# EAGLE board IOB-Adapter-Turtle_array (EAGLE 7.7.0)
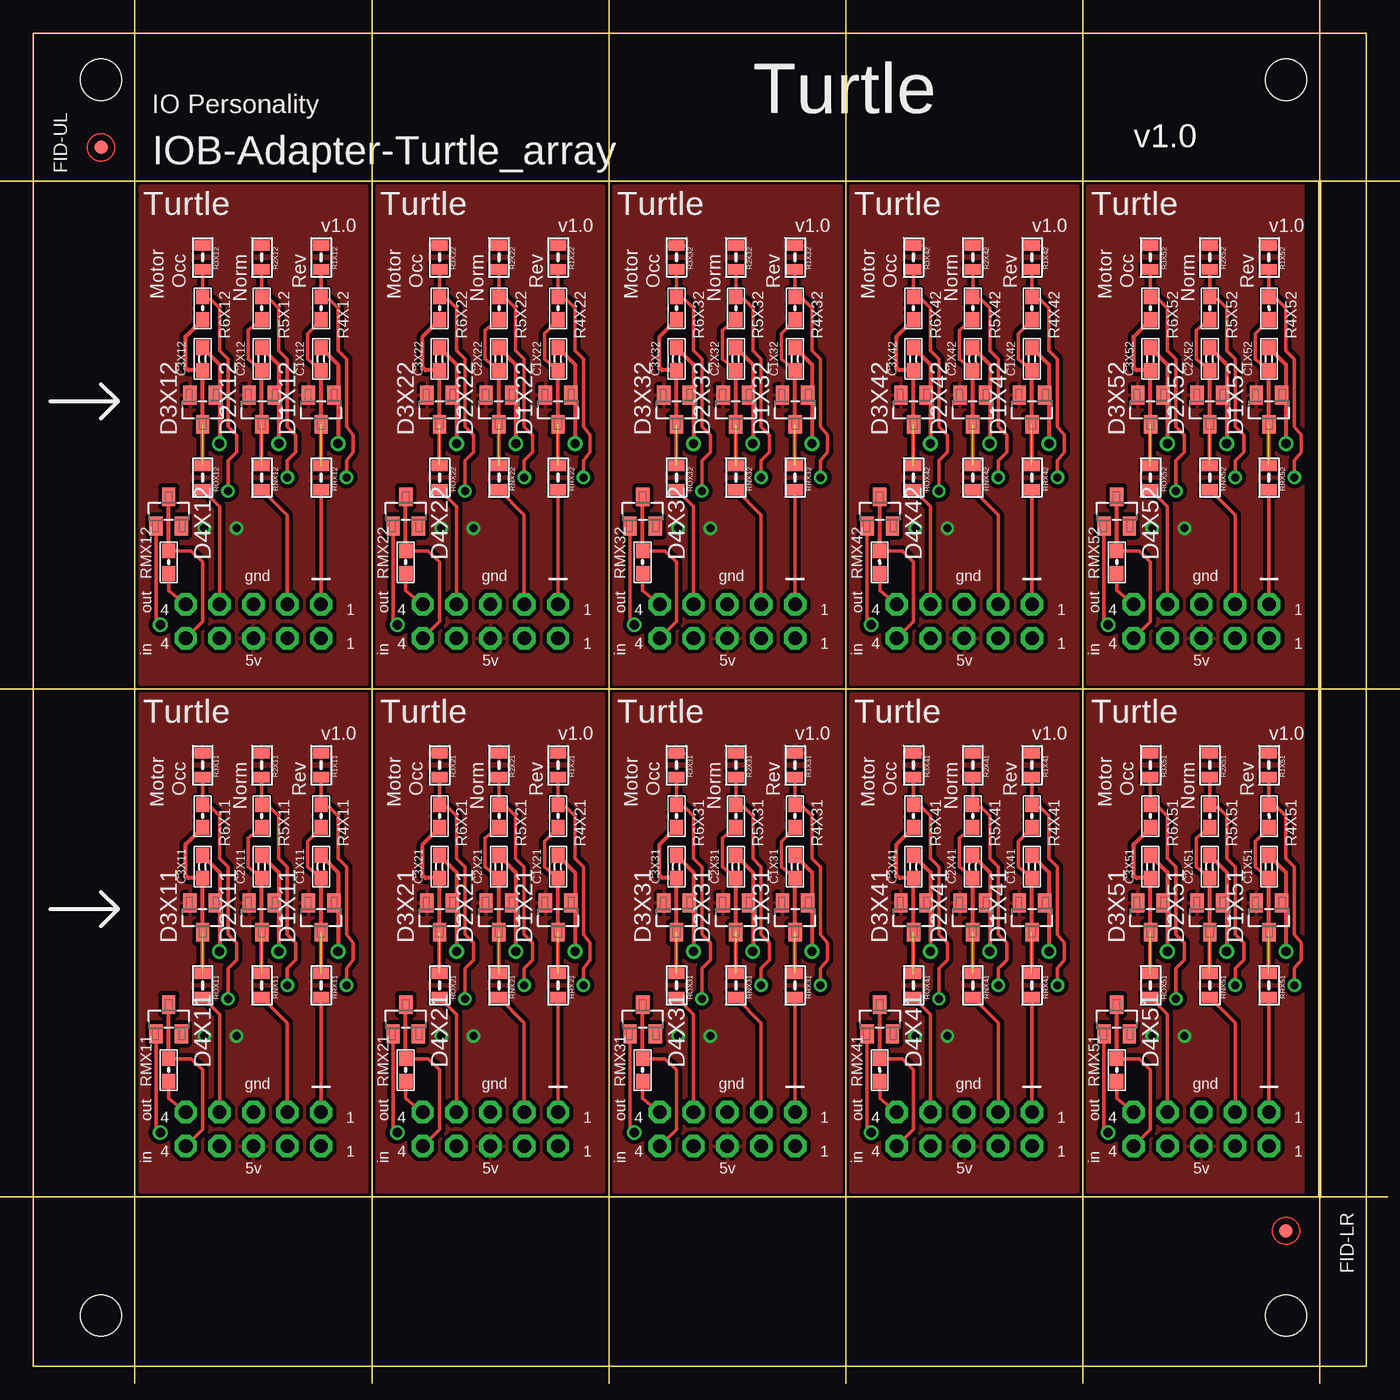
[diagram p0: board, top side]
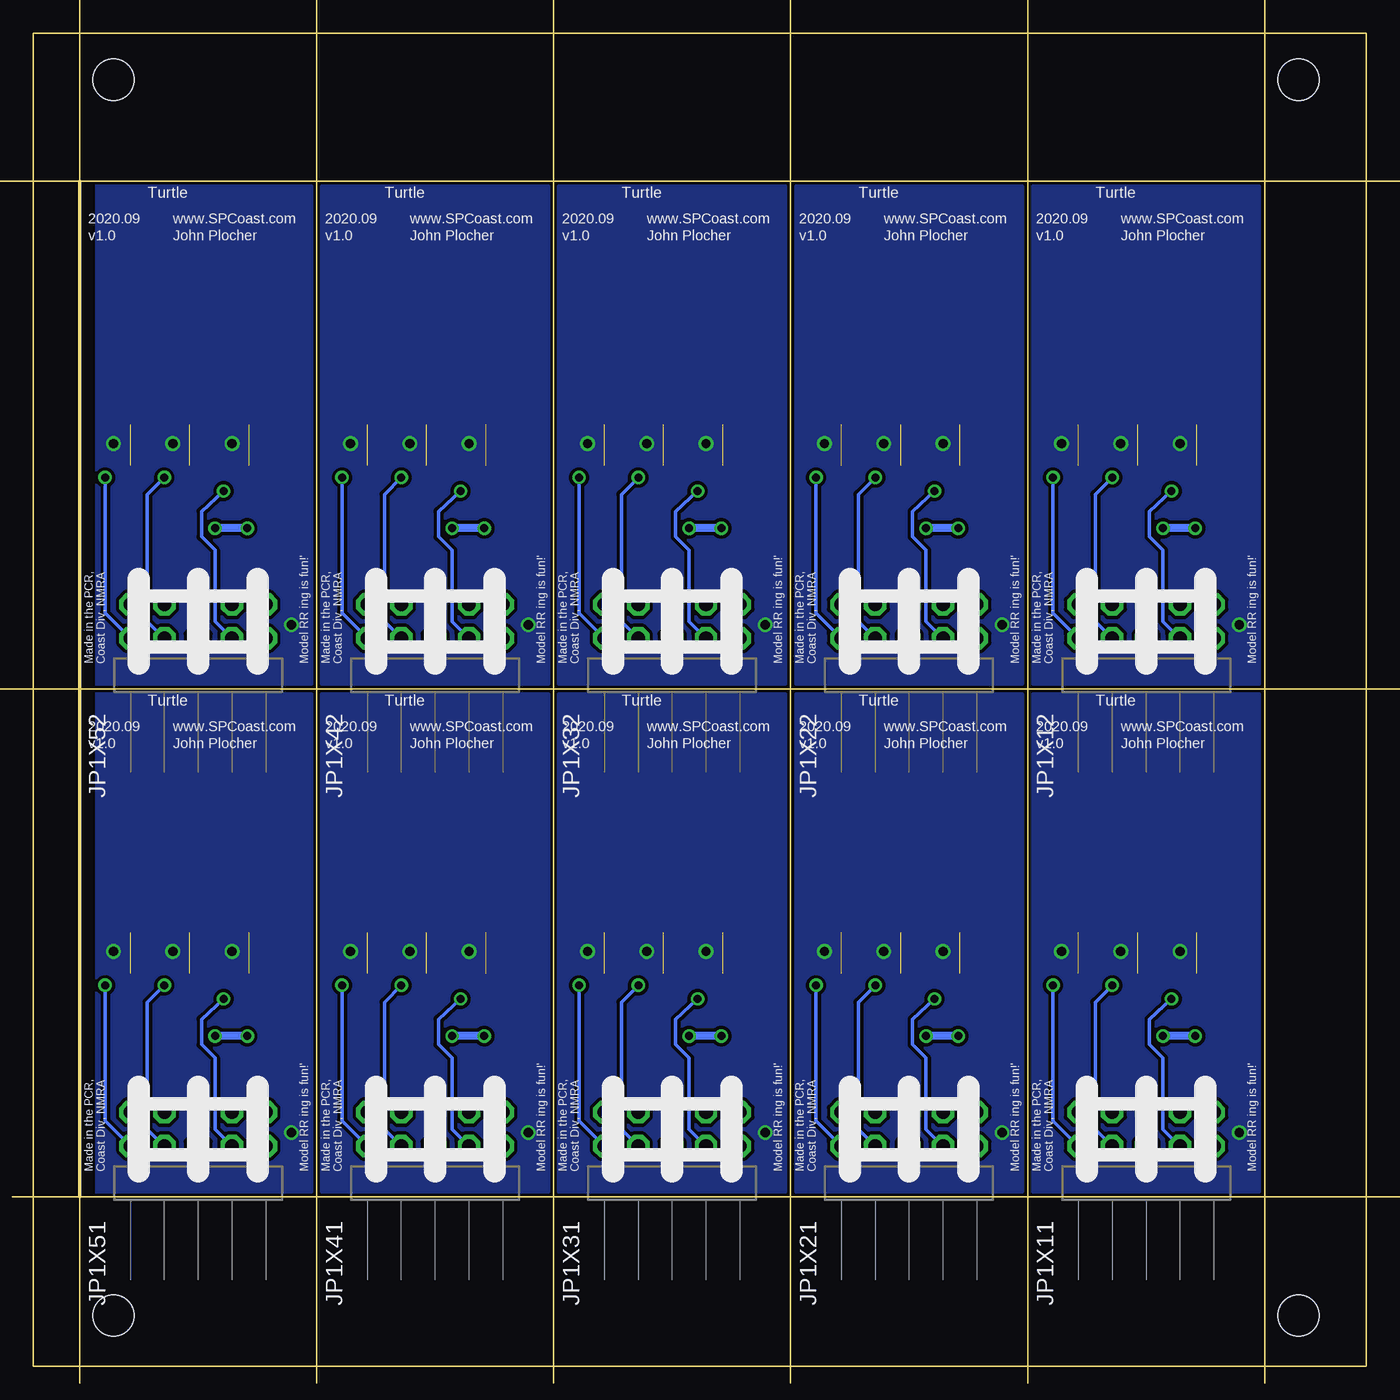
[diagram p1: board, bottom side, seen from below]

Size 100 x 100 mm. Coordinates in mm from the lower left corner, seen from the top.
Outline: 96.52,12.7 96.52,88.9
Copper layers (1*16): Top 0.035mm / dielectric 1.5mm / Bottom 0.035mm
Design rules "default": minimum track width 10mil, minimum drill 0.6mm, track to track 8mil, track to pad 8mil, pad to pad 8mil, via to via 8mil, smd to smd 8mil, copper to edge 40mil, drill to drill 8mil, minimum pad ring 10mil, minimum via ring 8mil, stop-mask expansion 4mil, vias tented up to drill 0mil, thermal gap 10mil

## Footprints (pad centres in the part's own frame; a part is rotated, then mirrored left to right if it is on the bottom)
0603-CAP = smd 1.1 x 1: 1 -0.85,0; 2 0.85,0
BOARD-DINRAIL-3.17IN-5X2-IOP = hole 3.1: 5.08,96.52; 93.98,96.52; 5.08,3.81; 93.98,3.81
SOT23 = smd 1.4 x 1: 1 1.1,-0.95; 2 1.1,0.95; 3 -1.1,0
FIDUCIAL_1MM = smd 1 x 1: 1 0,0
IOB-V3-MODULE = drill 1.016 pad 1.676 octagon: 1 -1.27,-5.08; 2 1.27,-5.08; 3 -1.27,-2.54; 4 1.27,-2.54; 5 -1.27,0; 6 1.27,0; 7 -1.27,2.54; 8 1.27,2.54; 9 -1.27,5.08; 10 1.27,5.08
0805-RES = smd 0.8 x 1.2: 1 -0.9,0; 2 0.9,0
0603-RES = smd 1.1 x 1: 1 -0.85,0; 2 0.85,0

## Placement (x,y rotation side)
C1X11  0.01uF  [0603-CAP]  21.59,37.47 90 top
C1X12  0.01uF  [0603-CAP]  21.59,75.56 90 top
C1X21  0.01uF  [0603-CAP]  39.37,37.47 90 top
C1X22  0.01uF  [0603-CAP]  39.37,75.56 90 top
C1X31  0.01uF  [0603-CAP]  57.15,37.47 90 top
C1X32  0.01uF  [0603-CAP]  57.15,75.56 90 top
C1X41  0.01uF  [0603-CAP]  74.93,37.47 90 top
C1X42  0.01uF  [0603-CAP]  74.93,75.56 90 top
C1X51  0.01uF  [0603-CAP]  92.71,37.47 90 top
C1X52  0.01uF  [0603-CAP]  92.71,75.56 90 top
C2X11  0.01uF  [0603-CAP]  17.14,37.47 90 top
C2X12  0.01uF  [0603-CAP]  17.14,75.56 90 top
C2X21  0.01uF  [0603-CAP]  34.92,37.47 90 top
C2X22  0.01uF  [0603-CAP]  34.92,75.56 90 top
C2X31  0.01uF  [0603-CAP]  52.7,37.47 90 top
C2X32  0.01uF  [0603-CAP]  52.7,75.56 90 top
C2X41  0.01uF  [0603-CAP]  70.48,37.47 90 top
C2X42  0.01uF  [0603-CAP]  70.48,75.56 90 top
C2X51  0.01uF  [0603-CAP]  88.27,37.47 90 top
C2X52  0.01uF  [0603-CAP]  88.27,75.56 90 top
C3X11  0.01uF  [0603-CAP]  12.7,37.47 90 top
C3X12  0.01uF  [0603-CAP]  12.7,75.56 90 top
C3X21  0.01uF  [0603-CAP]  30.48,37.47 90 top
C3X22  0.01uF  [0603-CAP]  30.48,75.56 90 top
C3X31  0.01uF  [0603-CAP]  48.26,37.47 90 top
C3X32  0.01uF  [0603-CAP]  48.26,75.56 90 top
C3X41  0.01uF  [0603-CAP]  66.04,37.47 90 top
C3X42  0.01uF  [0603-CAP]  66.04,75.56 90 top
C3X51  0.01uF  [0603-CAP]  83.82,37.47 90 top
C3X52  0.01uF  [0603-CAP]  83.82,75.56 90 top
CARRIER  BOARD  [BOARD-DINRAIL-3.17IN-5X2-IOP]  0,0 0 top
D1X11  BAT54S  [SOT23]  21.59,33.66 90 top
D1X12  BAT54S  [SOT23]  21.59,71.75 90 top
D1X21  BAT54S  [SOT23]  39.37,33.66 90 top
D1X22  BAT54S  [SOT23]  39.37,71.75 90 top
D1X31  BAT54S  [SOT23]  57.15,33.66 90 top
D1X32  BAT54S  [SOT23]  57.15,71.75 90 top
D1X41  BAT54S  [SOT23]  74.93,33.66 90 top
D1X42  BAT54S  [SOT23]  74.93,71.75 90 top
D1X51  BAT54S  [SOT23]  92.71,33.66 90 top
D1X52  BAT54S  [SOT23]  92.71,71.75 90 top
D2X11  BAT54S  [SOT23]  17.14,33.66 90 top
D2X12  BAT54S  [SOT23]  17.14,71.75 90 top
D2X21  BAT54S  [SOT23]  34.92,33.66 90 top
D2X22  BAT54S  [SOT23]  34.92,71.75 90 top
D2X31  BAT54S  [SOT23]  52.7,33.66 90 top
D2X32  BAT54S  [SOT23]  52.7,71.75 90 top
D2X41  BAT54S  [SOT23]  70.48,33.66 90 top
D2X42  BAT54S  [SOT23]  70.48,71.75 90 top
D2X51  BAT54S  [SOT23]  88.27,33.66 90 top
D2X52  BAT54S  [SOT23]  88.27,71.75 90 top
D3X11  BAT54S  [SOT23]  12.7,33.66 90 top
D3X12  BAT54S  [SOT23]  12.7,71.75 90 top
D3X21  BAT54S  [SOT23]  30.48,33.66 90 top
D3X22  BAT54S  [SOT23]  30.48,71.75 90 top
D3X31  BAT54S  [SOT23]  48.26,33.66 90 top
D3X32  BAT54S  [SOT23]  48.26,71.75 90 top
D3X41  BAT54S  [SOT23]  66.04,33.66 90 top
D3X42  BAT54S  [SOT23]  66.04,71.75 90 top
D3X51  BAT54S  [SOT23]  83.82,33.66 90 top
D3X52  BAT54S  [SOT23]  83.82,71.75 90 top
D4X11  4.7v  [SOT23]  10.16,26.04 270 top
D4X12  4.7v  [SOT23]  10.16,64.14 270 top
D4X21  4.7v  [SOT23]  27.94,26.04 270 top
D4X22  4.7v  [SOT23]  27.94,64.14 270 top
D4X31  4.7v  [SOT23]  45.72,26.04 270 top
D4X32  4.7v  [SOT23]  45.72,64.14 270 top
D4X41  4.7v  [SOT23]  63.5,26.04 270 top
D4X42  4.7v  [SOT23]  63.5,64.14 270 top
D4X51  4.7v  [SOT23]  81.28,26.04 270 top
D4X52  4.7v  [SOT23]  81.28,64.14 270 top
FID-LR  FIDUCIAL  [FIDUCIAL_1MM]  93.98,10.16 0 top
FID-UL  FIDUCIAL  [FIDUCIAL_1MM]  5.08,91.44 0 top
JP1X11  CONNECTOR-M05X2  [IOB-V3-MODULE]  16.51,17.78 270 bottom
JP1X12  CONNECTOR-M05X2  [IOB-V3-MODULE]  16.51,55.88 270 bottom
JP1X21  CONNECTOR-M05X2  [IOB-V3-MODULE]  34.29,17.78 270 bottom
JP1X22  CONNECTOR-M05X2  [IOB-V3-MODULE]  34.29,55.88 270 bottom
JP1X31  CONNECTOR-M05X2  [IOB-V3-MODULE]  52.07,17.78 270 bottom
JP1X32  CONNECTOR-M05X2  [IOB-V3-MODULE]  52.07,55.88 270 bottom
JP1X41  CONNECTOR-M05X2  [IOB-V3-MODULE]  69.85,17.78 270 bottom
JP1X42  CONNECTOR-M05X2  [IOB-V3-MODULE]  69.85,55.88 270 bottom
JP1X51  CONNECTOR-M05X2  [IOB-V3-MODULE]  87.63,17.78 270 bottom
JP1X52  CONNECTOR-M05X2  [IOB-V3-MODULE]  87.63,55.88 270 bottom
R1X11  10k  [0805-RES]  21.59,45.09 270 top
R1X12  10k  [0805-RES]  21.59,83.19 270 top
R1X21  10k  [0805-RES]  39.37,45.09 270 top
R1X22  10k  [0805-RES]  39.37,83.19 270 top
R1X31  10k  [0805-RES]  57.15,45.09 270 top
R1X32  10k  [0805-RES]  57.15,83.19 270 top
R1X41  10k  [0805-RES]  74.93,45.09 270 top
R1X42  10k  [0805-RES]  74.93,83.19 270 top
R1X51  10k  [0805-RES]  92.71,45.09 270 top
R1X52  10k  [0805-RES]  92.71,83.19 270 top
R2X11  10k  [0805-RES]  17.14,45.09 270 top
R2X12  10k  [0805-RES]  17.14,83.19 270 top
R2X21  10k  [0805-RES]  34.92,45.09 270 top
R2X22  10k  [0805-RES]  34.92,83.19 270 top
R2X31  10k  [0805-RES]  52.7,45.09 270 top
R2X32  10k  [0805-RES]  52.7,83.19 270 top
R2X41  10k  [0805-RES]  70.48,45.09 270 top
R2X42  10k  [0805-RES]  70.48,83.19 270 top
R2X51  10k  [0805-RES]  88.27,45.09 270 top
R2X52  10k  [0805-RES]  88.27,83.19 270 top
R3X11  10k  [0805-RES]  12.7,45.09 270 top
R3X12  10k  [0805-RES]  12.7,83.19 270 top
R3X21  10k  [0805-RES]  30.48,45.09 270 top
R3X22  10k  [0805-RES]  30.48,83.19 270 top
R3X31  10k  [0805-RES]  48.26,45.09 270 top
R3X32  10k  [0805-RES]  48.26,83.19 270 top
R3X41  10k  [0805-RES]  66.04,45.09 270 top
R3X42  10k  [0805-RES]  66.04,83.19 270 top
R3X51  10k  [0805-RES]  83.82,45.09 270 top
R3X52  10k  [0805-RES]  83.82,83.19 270 top
R4X11  1K0  [0603-RES]  21.59,41.27 270 top
R4X12  1K0  [0603-RES]  21.59,79.38 270 top
R4X21  1K0  [0603-RES]  39.37,41.27 270 top
R4X22  1K0  [0603-RES]  39.37,79.38 270 top
R4X31  1K0  [0603-RES]  57.15,41.27 270 top
R4X32  1K0  [0603-RES]  57.15,79.38 270 top
R4X41  1K0  [0603-RES]  74.93,41.27 270 top
R4X42  1K0  [0603-RES]  74.93,79.38 270 top
R4X51  1K0  [0603-RES]  92.71,41.27 270 top
R4X52  1K0  [0603-RES]  92.71,79.38 270 top
R5X11  1K0  [0603-RES]  17.14,41.27 270 top
R5X12  1K0  [0603-RES]  17.14,79.38 270 top
R5X21  1K0  [0603-RES]  34.92,41.27 270 top
R5X22  1K0  [0603-RES]  34.92,79.38 270 top
R5X31  1K0  [0603-RES]  52.7,41.27 270 top
R5X32  1K0  [0603-RES]  52.7,79.38 270 top
R5X41  1K0  [0603-RES]  70.48,41.27 270 top
R5X42  1K0  [0603-RES]  70.48,79.38 270 top
R5X51  1K0  [0603-RES]  88.27,41.27 270 top
R5X52  1K0  [0603-RES]  88.27,79.38 270 top
R6X11  1K0  [0603-RES]  12.7,41.27 270 top
R6X12  1K0  [0603-RES]  12.7,79.38 270 top
R6X21  1K0  [0603-RES]  30.48,41.27 270 top
R6X22  1K0  [0603-RES]  30.48,79.38 270 top
R6X31  1K0  [0603-RES]  48.26,41.27 270 top
R6X32  1K0  [0603-RES]  48.26,79.38 270 top
R6X41  1K0  [0603-RES]  66.04,41.27 270 top
R6X42  1K0  [0603-RES]  66.04,79.38 270 top
R6X51  1K0  [0603-RES]  83.82,41.27 270 top
R6X52  1K0  [0603-RES]  83.82,79.38 270 top
RMX11  1K0  [0603-RES]  10.16,22.23 90 top
RMX12  1K0  [0603-RES]  10.16,60.33 90 top
RMX21  1K0  [0603-RES]  27.94,22.23 90 top
RMX22  1K0  [0603-RES]  27.94,60.33 90 top
RMX31  1K0  [0603-RES]  45.72,22.23 90 top
RMX32  1K0  [0603-RES]  45.72,60.33 90 top
RMX41  1K0  [0603-RES]  63.5,22.23 90 top
RMX42  1K0  [0603-RES]  63.5,60.33 90 top
RMX51  1K0  [0603-RES]  81.28,22.23 90 top
RMX52  1K0  [0603-RES]  81.28,60.33 90 top
RNX11  82R  [0805-RES]  17.14,28.57 270 top
RNX12  82R  [0805-RES]  17.14,66.67 270 top
RNX21  82R  [0805-RES]  34.92,28.57 270 top
RNX22  82R  [0805-RES]  34.92,66.67 270 top
RNX31  82R  [0805-RES]  52.7,28.57 270 top
RNX32  82R  [0805-RES]  52.7,66.67 270 top
RNX41  82R  [0805-RES]  70.48,28.57 270 top
RNX42  82R  [0805-RES]  70.48,66.67 270 top
RNX51  82R  [0805-RES]  88.27,28.57 270 top
RNX52  82R  [0805-RES]  88.27,66.67 270 top
ROX11  82R  [0805-RES]  12.7,28.57 270 top
ROX12  82R  [0805-RES]  12.7,66.67 270 top
ROX21  82R  [0805-RES]  30.48,28.57 270 top
ROX22  82R  [0805-RES]  30.48,66.67 270 top
ROX31  82R  [0805-RES]  48.26,28.57 270 top
ROX32  82R  [0805-RES]  48.26,66.67 270 top
ROX41  82R  [0805-RES]  66.04,28.57 270 top
ROX42  82R  [0805-RES]  66.04,66.67 270 top
ROX51  82R  [0805-RES]  83.82,28.57 270 top
ROX52  82R  [0805-RES]  83.82,66.67 270 top
RRX11  82R  [0805-RES]  21.59,28.57 270 top
RRX12  82R  [0805-RES]  21.59,66.67 270 top
RRX21  82R  [0805-RES]  39.37,28.57 270 top
RRX22  82R  [0805-RES]  39.37,66.67 270 top
RRX31  82R  [0805-RES]  57.15,28.57 270 top
RRX32  82R  [0805-RES]  57.15,66.67 270 top
RRX41  82R  [0805-RES]  74.93,28.57 270 top
RRX42  82R  [0805-RES]  74.93,66.67 270 top
RRX51  82R  [0805-RES]  92.71,28.57 270 top
RRX52  82R  [0805-RES]  92.71,66.67 270 top

## Library data of the parts
C1X11 C1X12 C1X21 C1X22 C1X31 C1X32 C1X41 C1X42 C1X51 C1X52 C2X11 C2X12 C2X21 C2X22 C2X31 C2X32 C2X41 C2X42 C2X51 C2X52 C3X11 C3X12 C3X21 C3X22 C3X31 C3X32 C3X41 C3X42 C3X51 C3X52 CARRIER D1X11 D1X12 D1X21 D1X22 D1X31 D1X32 D1X41 D1X42 D1X51 D1X52 D2X11 D2X12 D2X21 D2X22 D2X31 D2X32 D2X41 D2X42 D2X51 D2X52 D3X11 D3X12 D3X21 D3X22 D3X31 D3X32 D3X41 D3X42 D3X51 D3X52 D4X11 D4X12 D4X21 D4X22 D4X31 D4X32 D4X41 D4X42 D4X51 D4X52 FID-LR FID-UL JP1X11 JP1X12 JP1X21 JP1X22 JP1X31 JP1X32 JP1X41 JP1X42 JP1X51 JP1X52 R1X11 R1X12 R1X21 R1X22 R1X31 R1X32 R1X41 R1X42 R1X51 R1X52 R2X11 R2X12 R2X21 R2X22 R2X31 R2X32 R2X41 R2X42 R2X51 R2X52 R3X11 R3X12 R3X21 R3X22 R3X31 R3X32 R3X41 R3X42 R3X51 R3X52 R4X11 R4X12 R4X21 R4X22 R4X31 R4X32 R4X41 R4X42 R4X51 R4X52 R5X11 R5X12 R5X21 R5X22 R5X31 R5X32 R5X41 R5X42 R5X51 R5X52 R6X11 R6X12 R6X21 R6X22 R6X31 R6X32 R6X41 R6X42 R6X51 R6X52 RMX11 RMX12 RMX21 RMX22 RMX31 RMX32 RMX41 RMX42 RMX51 RMX52 RNX11 RNX12 RNX21 RNX22 RNX31 RNX32 RNX41 RNX42 RNX51 RNX52 ROX11 ROX12 ROX21 ROX22 ROX31 ROX32 ROX41 ROX42 ROX51 ROX52 RRX11 RRX12 RRX21 RRX22 RRX31 RRX32 RRX41 RRX42 RRX51 RRX52 = SPCoast

## Nets
GNDX11: C1X11.2 C2X11.2 C3X11.2 D1X11.1 D2X11.1 D3X11.1 D4X11.1 JP1X11.5
GNDX12: C1X12.2 C2X12.2 C3X12.2 D1X12.1 D2X12.1 D3X12.1 D4X12.1 JP1X12.5
GNDX21: C1X21.2 C2X21.2 C3X21.2 D1X21.1 D2X21.1 D3X21.1 D4X21.1 JP1X21.5
GNDX22: C1X22.2 C2X22.2 C3X22.2 D1X22.1 D2X22.1 D3X22.1 D4X22.1 JP1X22.5
GNDX31: C1X31.2 C2X31.2 C3X31.2 D1X31.1 D2X31.1 D3X31.1 D4X31.1 JP1X31.5
GNDX32: C1X32.2 C2X32.2 C3X32.2 D1X32.1 D2X32.1 D3X32.1 D4X32.1 JP1X32.5
GNDX41: C1X41.2 C2X41.2 C3X41.2 D1X41.1 D2X41.1 D3X41.1 D4X41.1 JP1X41.5
GNDX42: C1X42.2 C2X42.2 C3X42.2 D1X42.1 D2X42.1 D3X42.1 D4X42.1 JP1X42.5
GNDX51: C1X51.2 C2X51.2 C3X51.2 D1X51.1 D2X51.1 D3X51.1 D4X51.1 JP1X51.5
GNDX52: C1X52.2 C2X52.2 C3X52.2 D1X52.1 D2X52.1 D3X52.1 D4X52.1 JP1X52.5
IO1X11: JP1X11.1 RRX11.2
IO1X12: JP1X12.1 RRX12.2
IO1X21: JP1X21.1 RRX21.2
IO1X22: JP1X22.1 RRX22.2
IO1X31: JP1X31.1 RRX31.2
IO1X32: JP1X32.1 RRX32.2
IO1X41: JP1X41.1 RRX41.2
IO1X42: JP1X42.1 RRX42.2
IO1X51: JP1X51.1 RRX51.2
IO1X52: JP1X52.1 RRX52.2
IO2X11: JP1X11.3 RNX11.2
IO2X12: JP1X12.3 RNX12.2
IO2X21: JP1X21.3 RNX21.2
IO2X22: JP1X22.3 RNX22.2
IO2X31: JP1X31.3 RNX31.2
IO2X32: JP1X32.3 RNX32.2
IO2X41: JP1X41.3 RNX41.2
IO2X42: JP1X42.3 RNX42.2
IO2X51: JP1X51.3 RNX51.2
IO2X52: JP1X52.3 RNX52.2
IO3X11: JP1X11.7 ROX11.2
IO3X12: JP1X12.7 ROX12.2
IO3X21: JP1X21.7 ROX21.2
IO3X22: JP1X22.7 ROX22.2
IO3X31: JP1X31.7 ROX31.2
IO3X32: JP1X32.7 ROX32.2
IO3X41: JP1X41.7 ROX41.2
IO3X42: JP1X42.7 ROX42.2
IO3X51: JP1X51.7 ROX51.2
IO3X52: JP1X52.7 ROX52.2
IO4X11: JP1X11.9 RMX11.1
IO4X12: JP1X12.9 RMX12.1
IO4X21: JP1X21.9 RMX21.1
IO4X22: JP1X22.9 RMX22.1
IO4X31: JP1X31.9 RMX31.1
IO4X32: JP1X32.9 RMX32.1
IO4X41: JP1X41.9 RMX41.1
IO4X42: JP1X42.9 RMX42.1
IO4X51: JP1X51.9 RMX51.1
IO4X52: JP1X52.9 RMX52.1
N$2X11: C2X11.1 D2X11.3 R5X11.2 RNX11.1
N$2X12: C2X12.1 D2X12.3 R5X12.2 RNX12.1
N$2X21: C2X21.1 D2X21.3 R5X21.2 RNX21.1
N$2X22: C2X22.1 D2X22.3 R5X22.2 RNX22.1
N$2X31: C2X31.1 D2X31.3 R5X31.2 RNX31.1
N$2X32: C2X32.1 D2X32.3 R5X32.2 RNX32.1
N$2X41: C2X41.1 D2X41.3 R5X41.2 RNX41.1
N$2X42: C2X42.1 D2X42.3 R5X42.2 RNX42.1
N$2X51: C2X51.1 D2X51.3 R5X51.2 RNX51.1
N$2X52: C2X52.1 D2X52.3 R5X52.2 RNX52.1
N$3X11: C1X11.1 D1X11.3 R4X11.2 RRX11.1
N$3X12: C1X12.1 D1X12.3 R4X12.2 RRX12.1
N$3X21: C1X21.1 D1X21.3 R4X21.2 RRX21.1
N$3X22: C1X22.1 D1X22.3 R4X22.2 RRX22.1
N$3X31: C1X31.1 D1X31.3 R4X31.2 RRX31.1
N$3X32: C1X32.1 D1X32.3 R4X32.2 RRX32.1
N$3X41: C1X41.1 D1X41.3 R4X41.2 RRX41.1
N$3X42: C1X42.1 D1X42.3 R4X42.2 RRX42.1
N$3X51: C1X51.1 D1X51.3 R4X51.2 RRX51.1
N$3X52: C1X52.1 D1X52.3 R4X52.2 RRX52.1
N$14X11: C3X11.1 D3X11.3 R6X11.2 ROX11.1
N$14X12: C3X12.1 D3X12.3 R6X12.2 ROX12.1
N$14X21: C3X21.1 D3X21.3 R6X21.2 ROX21.1
N$14X22: C3X22.1 D3X22.3 R6X22.2 ROX22.1
N$14X31: C3X31.1 D3X31.3 R6X31.2 ROX31.1
N$14X32: C3X32.1 D3X32.3 R6X32.2 ROX32.1
N$14X41: C3X41.1 D3X41.3 R6X41.2 ROX41.1
N$14X42: C3X42.1 D3X42.3 R6X42.2 ROX42.1
N$14X51: C3X51.1 D3X51.3 R6X51.2 ROX51.1
N$14X52: C3X52.1 D3X52.3 R6X52.2 ROX52.1
P1X11: JP1X11.2 R1X11.2 R4X11.1
P1X12: JP1X12.2 R1X12.2 R4X12.1
P1X21: JP1X21.2 R1X21.2 R4X21.1
P1X22: JP1X22.2 R1X22.2 R4X22.1
P1X31: JP1X31.2 R1X31.2 R4X31.1
P1X32: JP1X32.2 R1X32.2 R4X32.1
P1X41: JP1X41.2 R1X41.2 R4X41.1
P1X42: JP1X42.2 R1X42.2 R4X42.1
P1X51: JP1X51.2 R1X51.2 R4X51.1
P1X52: JP1X52.2 R1X52.2 R4X52.1
P2X11: JP1X11.4 R2X11.2 R5X11.1
P2X12: JP1X12.4 R2X12.2 R5X12.1
P2X21: JP1X21.4 R2X21.2 R5X21.1
P2X22: JP1X22.4 R2X22.2 R5X22.1
P2X31: JP1X31.4 R2X31.2 R5X31.1
P2X32: JP1X32.4 R2X32.2 R5X32.1
P2X41: JP1X41.4 R2X41.2 R5X41.1
P2X42: JP1X42.4 R2X42.2 R5X42.1
P2X51: JP1X51.4 R2X51.2 R5X51.1
P2X52: JP1X52.4 R2X52.2 R5X52.1
P3X11: JP1X11.8 R3X11.2 R6X11.1
P3X12: JP1X12.8 R3X12.2 R6X12.1
P3X21: JP1X21.8 R3X21.2 R6X21.1
P3X22: JP1X22.8 R3X22.2 R6X22.1
P3X31: JP1X31.8 R3X31.2 R6X31.1
P3X32: JP1X32.8 R3X32.2 R6X32.1
P3X41: JP1X41.8 R3X41.2 R6X41.1
P3X42: JP1X42.8 R3X42.2 R6X42.1
P3X51: JP1X51.8 R3X51.2 R6X51.1
P3X52: JP1X52.8 R3X52.2 R6X52.1
P4X11: D4X11.3 JP1X11.10 RMX11.2
P4X12: D4X12.3 JP1X12.10 RMX12.2
P4X21: D4X21.3 JP1X21.10 RMX21.2
P4X22: D4X22.3 JP1X22.10 RMX22.2
P4X31: D4X31.3 JP1X31.10 RMX31.2
P4X32: D4X32.3 JP1X32.10 RMX32.2
P4X41: D4X41.3 JP1X41.10 RMX41.2
P4X42: D4X42.3 JP1X42.10 RMX42.2
P4X51: D4X51.3 JP1X51.10 RMX51.2
P4X52: D4X52.3 JP1X52.10 RMX52.2
VCCX11: D1X11.2 D2X11.2 D3X11.2 JP1X11.6 R1X11.1 R2X11.1 R3X11.1
VCCX12: D1X12.2 D2X12.2 D3X12.2 JP1X12.6 R1X12.1 R2X12.1 R3X12.1
VCCX21: D1X21.2 D2X21.2 D3X21.2 JP1X21.6 R1X21.1 R2X21.1 R3X21.1
VCCX22: D1X22.2 D2X22.2 D3X22.2 JP1X22.6 R1X22.1 R2X22.1 R3X22.1
VCCX31: D1X31.2 D2X31.2 D3X31.2 JP1X31.6 R1X31.1 R2X31.1 R3X31.1
VCCX32: D1X32.2 D2X32.2 D3X32.2 JP1X32.6 R1X32.1 R2X32.1 R3X32.1
VCCX41: D1X41.2 D2X41.2 D3X41.2 JP1X41.6 R1X41.1 R2X41.1 R3X41.1
VCCX42: D1X42.2 D2X42.2 D3X42.2 JP1X42.6 R1X42.1 R2X42.1 R3X42.1
VCCX51: D1X51.2 D2X51.2 D3X51.2 JP1X51.6 R1X51.1 R2X51.1 R3X51.1
VCCX52: D1X52.2 D2X52.2 D3X52.2 JP1X52.6 R1X52.1 R2X52.1 R3X52.1

## Tracks (layer width: path | path; a pad name or v marks a point on that pad's centre or on a via)
GNDX11  (via drill 0.7 pad 1.11)
  Top 0.254: D4X11.1 9.21,17.84 v9.53,17.53
  Top 0.305: 13.97,35.08 D3X11.1 13.97,34.77 | 13.97,34.77 13.97,37.05 C3X11.2 | v18.41,31.11 18.41,34.76 D2X11.1 18.41,34.92 18.41,37.05 C2X11.2 | v22.86,31.11 22.86,34.76 D1X11.1 22.86,34.92 22.86,37.05 C1X11.2 | 13.97,34.77 v13.97,31.11
  pour Bottom (isolate 0.254, no thermals): 8,13.08 8,50.42 25.02,50.42 25.02,13.08
GNDX12  (via drill 0.7 pad 1.11)
  Top 0.254: D4X12.1 9.21,55.94 v9.53,55.63
  Top 0.305: 13.97,73.17 D3X12.1 13.97,72.88 | 13.97,72.88 13.97,75.14 C3X12.2 | v18.41,69.22 18.41,72.86 D2X12.1 18.41,73.03 18.41,75.14 C2X12.2 | v22.86,69.22 22.86,72.86 D1X12.1 22.86,73.03 22.86,75.14 C1X12.2 | 13.97,72.88 v13.97,69.22
  pour Bottom (isolate 0.254, no thermals): 8,51.18 8,88.52 25.02,88.52 25.02,51.18
GNDX21  (via drill 0.7 pad 1.11)
  Top 0.254: D4X21.1 26.99,17.84 v27.3,17.53
  Top 0.305: 31.75,35.08 D3X21.1 31.75,34.77 | 31.75,34.77 31.75,37.05 C3X21.2 | v36.2,31.11 36.2,34.76 D2X21.1 36.2,34.92 36.2,37.05 C2X21.2 | v40.64,31.11 40.64,34.76 D1X21.1 40.64,34.92 40.64,37.05 C1X21.2 | 31.75,34.77 v31.75,31.11
  pour Bottom (isolate 0.254, no thermals): 25.78,13.08 25.78,50.42 42.8,50.42 42.8,13.08
GNDX22  (via drill 0.7 pad 1.11)
  Top 0.254: D4X22.1 26.99,55.94 v27.3,55.63
  Top 0.305: 31.75,73.17 D3X22.1 31.75,72.88 | 31.75,72.88 31.75,75.14 C3X22.2 | v36.2,69.22 36.2,72.86 D2X22.1 36.2,73.03 36.2,75.14 C2X22.2 | v40.64,69.22 40.64,72.86 D1X22.1 40.64,73.03 40.64,75.14 C1X22.2 | 31.75,72.88 v31.75,69.22
  pour Bottom (isolate 0.254, no thermals): 25.78,51.18 25.78,88.52 42.8,88.52 42.8,51.18
GNDX31  (via drill 0.7 pad 1.11)
  Top 0.254: D4X31.1 44.77,17.84 v45.09,17.53
  Top 0.305: 49.53,35.08 D3X31.1 49.53,34.77 | 49.53,34.77 49.53,37.05 C3X31.2 | v53.98,31.11 53.98,34.76 D2X31.1 53.98,34.92 53.98,37.05 C2X31.2 | v58.42,31.11 58.42,34.76 D1X31.1 58.42,34.92 58.42,37.05 C1X31.2 | 49.53,34.77 v49.53,31.11
  pour Bottom (isolate 0.254, no thermals): 43.56,13.08 43.56,50.42 60.58,50.42 60.58,13.08
GNDX32  (via drill 0.7 pad 1.11)
  Top 0.254: D4X32.1 44.77,55.94 v45.09,55.63
  Top 0.305: 49.53,73.17 D3X32.1 49.53,72.88 | 49.53,72.88 49.53,75.14 C3X32.2 | v53.98,69.22 53.98,72.86 D2X32.1 53.98,73.03 53.98,75.14 C2X32.2 | v58.42,69.22 58.42,72.86 D1X32.1 58.42,73.03 58.42,75.14 C1X32.2 | 49.53,72.88 v49.53,69.22
  pour Bottom (isolate 0.254, no thermals): 43.56,51.18 43.56,88.52 60.58,88.52 60.58,51.18
GNDX41  (via drill 0.7 pad 1.11)
  Top 0.254: D4X41.1 62.55,17.84 v62.87,17.53
  Top 0.305: 67.31,35.08 D3X41.1 67.31,34.77 | 67.31,34.77 67.31,37.05 C3X41.2 | v71.75,31.11 71.75,34.76 D2X41.1 71.75,34.92 71.75,37.05 C2X41.2 | v76.2,31.11 76.2,34.76 D1X41.1 76.2,34.92 76.2,37.05 C1X41.2 | 67.31,34.77 v67.31,31.11
  pour Bottom (isolate 0.254, no thermals): 61.34,13.08 61.34,50.42 78.36,50.42 78.36,13.08
GNDX42  (via drill 0.7 pad 1.11)
  Top 0.254: D4X42.1 62.55,55.94 v62.87,55.63
  Top 0.305: 67.31,73.17 D3X42.1 67.31,72.88 | 67.31,72.88 67.31,75.14 C3X42.2 | v71.75,69.22 71.75,72.86 D2X42.1 71.75,73.03 71.75,75.14 C2X42.2 | v76.2,69.22 76.2,72.86 D1X42.1 76.2,73.03 76.2,75.14 C1X42.2 | 67.31,72.88 v67.31,69.22
  pour Bottom (isolate 0.254, no thermals): 61.34,51.18 61.34,88.52 78.36,88.52 78.36,51.18
GNDX51  (via drill 0.7 pad 1.11)
  Top 0.254: D4X51.1 80.33,17.84 v80.64,17.53
  Top 0.305: 85.09,35.08 D3X51.1 85.09,34.77 | 85.09,34.77 85.09,37.05 C3X51.2 | v89.53,31.11 89.53,34.76 D2X51.1 89.53,34.92 89.53,37.05 C2X51.2 | v93.98,31.11 93.98,34.76 D1X51.1 93.98,34.92 93.98,37.05 C1X51.2 | 85.09,34.77 v85.09,31.11
  pour Bottom (isolate 0.254, no thermals): 79.12,13.08 79.12,50.42 96.14,50.42 96.14,13.08
GNDX52  (via drill 0.7 pad 1.11)
  Top 0.254: D4X52.1 80.33,55.94 v80.64,55.63
  Top 0.305: 85.09,73.17 D3X52.1 85.09,72.88 | 85.09,72.88 85.09,75.14 C3X52.2 | v89.53,69.22 89.53,72.86 D2X52.1 89.53,73.03 89.53,75.14 C2X52.2 | v93.98,69.22 93.98,72.86 D1X52.1 93.98,73.03 93.98,75.14 C1X52.2 | 85.09,72.88 v85.09,69.22
  pour Bottom (isolate 0.254, no thermals): 79.12,51.18 79.12,88.52 96.14,88.52 96.14,51.18
IO1X11
  Top 0.254: RRX11.2 JP1X11.1
IO1X12
  Top 0.254: RRX12.2 JP1X12.1
IO1X21
  Top 0.254: RRX21.2 JP1X21.1
IO1X22
  Top 0.254: RRX22.2 JP1X22.1
IO1X31
  Top 0.254: RRX31.2 JP1X31.1
IO1X32
  Top 0.254: RRX32.2 JP1X32.1
IO1X41
  Top 0.254: RRX41.2 JP1X41.1
IO1X42
  Top 0.254: RRX42.2 JP1X42.1
IO1X51
  Top 0.254: RRX51.2 JP1X51.1
IO1X52
  Top 0.254: RRX52.2 JP1X52.1
IO2X11
  Top 0.254: RNX11.2 19.05,25.77 JP1X11.3
IO2X12
  Top 0.254: RNX12.2 19.05,63.87 JP1X12.3
IO2X21
  Top 0.254: RNX21.2 36.83,25.77 JP1X21.3
IO2X22
  Top 0.254: RNX22.2 36.83,63.87 JP1X22.3
IO2X31
  Top 0.254: RNX31.2 54.61,25.77 JP1X31.3
IO2X32
  Top 0.254: RNX32.2 54.61,63.87 JP1X32.3
IO2X41
  Top 0.254: RNX41.2 72.39,25.77 JP1X41.3
IO2X42
  Top 0.254: RNX42.2 72.39,63.87 JP1X42.3
IO2X51
  Top 0.254: RNX51.2 90.17,25.77 JP1X51.3
IO2X52
  Top 0.254: RNX52.2 90.17,63.87 JP1X52.3
IO3X11
  Top 0.254: ROX11.2 13.97,26.41 JP1X11.7
IO3X12
  Top 0.254: ROX12.2 13.97,64.5 JP1X12.7
IO3X21
  Top 0.254: ROX21.2 31.75,26.41 JP1X21.7
IO3X22
  Top 0.254: ROX22.2 31.75,64.5 JP1X22.7
IO3X31
  Top 0.254: ROX31.2 49.53,26.41 JP1X31.7
IO3X32
  Top 0.254: ROX32.2 49.53,64.5 JP1X32.7
IO3X41
  Top 0.254: ROX41.2 67.31,26.41 JP1X41.7
IO3X42
  Top 0.254: ROX42.2 67.31,64.5 JP1X42.7
IO3X51
  Top 0.254: ROX51.2 85.09,26.41 JP1X51.7
IO3X52
  Top 0.254: ROX52.2 85.09,64.5 JP1X52.7
IO4X11
  Top 0.254: RMX11.1 10.16,20.11 JP1X11.9
IO4X12
  Top 0.254: RMX12.1 10.16,58.2 JP1X12.9
IO4X21
  Top 0.254: RMX21.1 27.94,20.11 JP1X21.9
IO4X22
  Top 0.254: RMX22.1 27.94,58.2 JP1X22.9
IO4X31
  Top 0.254: RMX31.1 45.72,20.11 JP1X31.9
IO4X32
  Top 0.254: RMX32.1 45.72,58.2 JP1X32.9
IO4X41
  Top 0.254: RMX41.1 63.5,20.11 JP1X41.9
IO4X42
  Top 0.254: RMX42.1 63.5,58.2 JP1X42.9
IO4X51
  Top 0.254: RMX51.1 81.28,20.11 JP1X51.9
IO4X52
  Top 0.254: RMX52.1 81.28,58.2 JP1X52.9
N$2X11  (1 unrouted)
  Top 0.254: C2X11.1 16.13,37.47 16.13,39.62 R5X11.2
  Top 0.305: RNX11.1 C2X11.1
N$2X12  (1 unrouted)
  Top 0.254: C2X12.1 16.13,75.56 16.13,77.72 R5X12.2
  Top 0.305: RNX12.1 C2X12.1
N$2X21  (1 unrouted)
  Top 0.254: C2X21.1 33.91,37.47 33.91,39.62 R5X21.2
  Top 0.305: RNX21.1 C2X21.1
N$2X22  (1 unrouted)
  Top 0.254: C2X22.1 33.91,75.56 33.91,77.72 R5X22.2
  Top 0.305: RNX22.1 C2X22.1
N$2X31  (1 unrouted)
  Top 0.254: C2X31.1 51.69,37.47 51.69,39.62 R5X31.2
  Top 0.305: RNX31.1 C2X31.1
N$2X32  (1 unrouted)
  Top 0.254: C2X32.1 51.69,75.56 51.69,77.72 R5X32.2
  Top 0.305: RNX32.1 C2X32.1
N$2X41  (1 unrouted)
  Top 0.254: C2X41.1 69.47,37.47 69.47,39.62 R5X41.2
  Top 0.305: RNX41.1 C2X41.1
N$2X42  (1 unrouted)
  Top 0.254: C2X42.1 69.47,75.56 69.47,77.72 R5X42.2
  Top 0.305: RNX42.1 C2X42.1
N$2X51  (1 unrouted)
  Top 0.254: C2X51.1 87.25,37.47 87.25,39.62 R5X51.2
  Top 0.305: RNX51.1 C2X51.1
N$2X52  (1 unrouted)
  Top 0.254: C2X52.1 87.25,75.56 87.25,77.72 R5X52.2
  Top 0.305: RNX52.1 C2X52.1
N$3X11  (1 unrouted)
  Top 0.254: C1X11.1 20.57,37.47 20.57,39.37 R4X11.2
  Top 0.305: RRX11.1 C1X11.1
N$3X12  (1 unrouted)
  Top 0.254: C1X12.1 20.57,75.56 20.57,77.47 R4X12.2
  Top 0.305: RRX12.1 C1X12.1
N$3X21  (1 unrouted)
  Top 0.254: C1X21.1 38.35,37.47 38.35,39.37 R4X21.2
  Top 0.305: RRX21.1 C1X21.1
N$3X22  (1 unrouted)
  Top 0.254: C1X22.1 38.35,75.56 38.35,77.47 R4X22.2
  Top 0.305: RRX22.1 C1X22.1
N$3X31  (1 unrouted)
  Top 0.254: C1X31.1 56.13,37.47 56.13,39.37 R4X31.2
  Top 0.305: RRX31.1 C1X31.1
N$3X32  (1 unrouted)
  Top 0.254: C1X32.1 56.13,75.56 56.13,77.47 R4X32.2
  Top 0.305: RRX32.1 C1X32.1
N$3X41  (1 unrouted)
  Top 0.254: C1X41.1 73.91,37.47 73.91,39.37 R4X41.2
  Top 0.305: RRX41.1 C1X41.1
N$3X42  (1 unrouted)
  Top 0.254: C1X42.1 73.91,75.56 73.91,77.47 R4X42.2
  Top 0.305: RRX42.1 C1X42.1
N$3X51  (1 unrouted)
  Top 0.254: C1X51.1 91.69,37.47 91.69,39.37 R4X51.2
  Top 0.305: RRX51.1 C1X51.1
N$3X52  (1 unrouted)
  Top 0.254: C1X52.1 91.69,75.56 91.69,77.47 R4X52.2
  Top 0.305: RRX52.1 C1X52.1
N$14X11  (1 unrouted)
  Top 0.305: ROX11.1 C3X11.1 11.64,36.62 11.43,36.83 11.43,39.16 R6X11.2
N$14X12  (1 unrouted)
  Top 0.305: ROX12.1 C3X12.1 11.64,74.72 11.43,74.93 11.43,77.25 R6X12.2
N$14X21  (1 unrouted)
  Top 0.305: ROX21.1 C3X21.1 29.43,36.62 29.21,36.83 29.21,39.16 R6X21.2
N$14X22  (1 unrouted)
  Top 0.305: ROX22.1 C3X22.1 29.43,74.72 29.21,74.93 29.21,77.25 R6X22.2
N$14X31  (1 unrouted)
  Top 0.305: ROX31.1 C3X31.1 47.2,36.62 46.99,36.83 46.99,39.16 R6X31.2
N$14X32  (1 unrouted)
  Top 0.305: ROX32.1 C3X32.1 47.2,74.72 46.99,74.93 46.99,77.25 R6X32.2
N$14X41  (1 unrouted)
  Top 0.305: ROX41.1 C3X41.1 64.98,36.62 64.77,36.83 64.77,39.16 R6X41.2
N$14X42  (1 unrouted)
  Top 0.305: ROX42.1 C3X42.1 64.98,74.72 64.77,74.93 64.77,77.25 R6X42.2
N$14X51  (1 unrouted)
  Top 0.305: ROX51.1 C3X51.1 82.77,36.62 82.55,36.83 82.55,39.16 R6X51.2
N$14X52  (1 unrouted)
  Top 0.305: ROX52.1 C3X52.1 82.77,74.72 82.55,74.93 82.55,77.25 R6X52.2
P1X11  (via drill 0.6 pad 1.01)
  Top 0.254: R1X11.2 R4X11.1 21.8,41.91 22.23,41.91 22.86,41.27 22.86,38.1 23.5,37.47 23.5,32.38 24,31.75 24,30.48 23.5,29.84 v23.5,28.57
  Bottom 0.254: v23.5,28.57 23.5,18.41 JP1X11.2
P1X12  (via drill 0.6 pad 1.01)
  Top 0.254: R1X12.2 R4X12.1 21.8,80.01 22.23,80.01 22.86,79.38 22.86,76.2 23.5,75.56 23.5,70.48 24,69.85 24,68.58 23.5,67.94 v23.5,66.67
  Bottom 0.254: v23.5,66.67 23.5,56.52 JP1X12.2
P1X21  (via drill 0.6 pad 1.01)
  Top 0.254: R1X21.2 R4X21.1 39.59,41.91 40.01,41.91 40.64,41.27 40.64,38.1 41.27,37.47 41.27,32.38 41.78,31.75 41.78,30.48 41.27,29.84 v41.27,28.57
  Bottom 0.254: v41.27,28.57 41.27,18.41 JP1X21.2
P1X22  (via drill 0.6 pad 1.01)
  Top 0.254: R1X22.2 R4X22.1 39.59,80.01 40.01,80.01 40.64,79.38 40.64,76.2 41.27,75.56 41.27,70.48 41.78,69.85 41.78,68.58 41.27,67.94 v41.27,66.67
  Bottom 0.254: v41.27,66.67 41.27,56.52 JP1X22.2
P1X31  (via drill 0.6 pad 1.01)
  Top 0.254: R1X31.2 R4X31.1 57.37,41.91 57.78,41.91 58.42,41.27 58.42,38.1 59.05,37.47 59.05,32.38 59.56,31.75 59.56,30.48 59.05,29.84 v59.05,28.57
  Bottom 0.254: v59.05,28.57 59.05,18.41 JP1X31.2
P1X32  (via drill 0.6 pad 1.01)
  Top 0.254: R1X32.2 R4X32.1 57.37,80.01 57.78,80.01 58.42,79.38 58.42,76.2 59.05,75.56 59.05,70.48 59.56,69.85 59.56,68.58 59.05,67.94 v59.05,66.67
  Bottom 0.254: v59.05,66.67 59.05,56.52 JP1X32.2
P1X41  (via drill 0.6 pad 1.01)
  Top 0.254: R1X41.2 R4X41.1 75.14,41.91 75.56,41.91 76.2,41.27 76.2,38.1 76.83,37.47 76.83,32.38 77.34,31.75 77.34,30.48 76.83,29.84 v76.83,28.57
  Bottom 0.254: v76.83,28.57 76.83,18.41 JP1X41.2
P1X42  (via drill 0.6 pad 1.01)
  Top 0.254: R1X42.2 R4X42.1 75.14,80.01 75.56,80.01 76.2,79.38 76.2,76.2 76.83,75.56 76.83,70.48 77.34,69.85 77.34,68.58 76.83,67.94 v76.83,66.67
  Bottom 0.254: v76.83,66.67 76.83,56.52 JP1X42.2
P1X51  (via drill 0.6 pad 1.01)
  Top 0.254: R1X51.2 R4X51.1 92.92,41.91 93.34,41.91 93.98,41.27 93.98,38.1 94.61,37.47 94.61,32.38 95.12,31.75 95.12,30.48 94.61,29.84 v94.61,28.57
  Bottom 0.254: v94.61,28.57 94.61,18.41 JP1X51.2
P1X52  (via drill 0.6 pad 1.01)
  Top 0.254: R1X52.2 R4X52.1 92.92,80.01 93.34,80.01 93.98,79.38 93.98,76.2 94.61,75.56 94.61,70.48 95.12,69.85 95.12,68.58 94.61,67.94 v94.61,66.67
  Bottom 0.254: v94.61,66.67 94.61,56.52 JP1X52.2
P2X11  (via drill 0.6 pad 1.01)
  Top 0.254: R2X11.2 R5X11.1 17.36,41.91 17.78,41.91 18.41,41.27 18.41,38.1 19.05,37.47 19.05,32.38 19.68,31.75 19.68,30.48 19.05,29.84 v19.05,28.57
  Bottom 0.254: v19.05,28.57 20.32,27.3 20.32,17.78 JP1X11.4
P2X12  (via drill 0.6 pad 1.01)
  Top 0.254: R2X12.2 R5X12.1 17.36,80.01 17.78,80.01 18.41,79.38 18.41,76.2 19.05,75.56 19.05,70.48 19.68,69.85 19.68,68.58 19.05,67.94 v19.05,66.67
  Bottom 0.254: v19.05,66.67 20.32,65.41 20.32,55.88 JP1X12.4
P2X21  (via drill 0.6 pad 1.01)
  Top 0.254: R2X21.2 R5X21.1 35.14,41.91 35.56,41.91 36.2,41.27 36.2,38.1 36.83,37.47 36.83,32.38 37.47,31.75 37.47,30.48 36.83,29.84 v36.83,28.57
  Bottom 0.254: v36.83,28.57 38.1,27.3 38.1,17.78 JP1X21.4
P2X22  (via drill 0.6 pad 1.01)
  Top 0.254: R2X22.2 R5X22.1 35.14,80.01 35.56,80.01 36.2,79.38 36.2,76.2 36.83,75.56 36.83,70.48 37.47,69.85 37.47,68.58 36.83,67.94 v36.83,66.67
  Bottom 0.254: v36.83,66.67 38.1,65.41 38.1,55.88 JP1X22.4
P2X31  (via drill 0.6 pad 1.01)
  Top 0.254: R2X31.2 R5X31.1 52.92,41.91 53.34,41.91 53.98,41.27 53.98,38.1 54.61,37.47 54.61,32.38 55.24,31.75 55.24,30.48 54.61,29.84 v54.61,28.57
  Bottom 0.254: v54.61,28.57 55.88,27.3 55.88,17.78 JP1X31.4
P2X32  (via drill 0.6 pad 1.01)
  Top 0.254: R2X32.2 R5X32.1 52.92,80.01 53.34,80.01 53.98,79.38 53.98,76.2 54.61,75.56 54.61,70.48 55.24,69.85 55.24,68.58 54.61,67.94 v54.61,66.67
  Bottom 0.254: v54.61,66.67 55.88,65.41 55.88,55.88 JP1X32.4
P2X41  (via drill 0.6 pad 1.01)
  Top 0.254: R2X41.2 R5X41.1 70.7,41.91 71.12,41.91 71.75,41.27 71.75,38.1 72.39,37.47 72.39,32.38 73.03,31.75 73.03,30.48 72.39,29.84 v72.39,28.57
  Bottom 0.254: v72.39,28.57 73.66,27.3 73.66,17.78 JP1X41.4
P2X42  (via drill 0.6 pad 1.01)
  Top 0.254: R2X42.2 R5X42.1 70.7,80.01 71.12,80.01 71.75,79.38 71.75,76.2 72.39,75.56 72.39,70.48 73.03,69.85 73.03,68.58 72.39,67.94 v72.39,66.67
  Bottom 0.254: v72.39,66.67 73.66,65.41 73.66,55.88 JP1X42.4
P2X51  (via drill 0.6 pad 1.01)
  Top 0.254: R2X51.2 R5X51.1 88.48,41.91 88.9,41.91 89.53,41.27 89.53,38.1 90.17,37.47 90.17,32.38 90.81,31.75 90.81,30.48 90.17,29.84 v90.17,28.57
  Bottom 0.254: v90.17,28.57 91.44,27.3 91.44,17.78 JP1X51.4
P2X52  (via drill 0.6 pad 1.01)
  Top 0.254: R2X52.2 R5X52.1 88.48,80.01 88.9,80.01 89.53,79.38 89.53,76.2 90.17,75.56 90.17,70.48 90.81,69.85 90.81,68.58 90.17,67.94 v90.17,66.67
  Bottom 0.254: v90.17,66.67 91.44,65.41 91.44,55.88 JP1X52.4
P3X11  (via drill 0.6 pad 1.01)
  Top 0.254: R3X11.2 R6X11.1 12.91,41.91 13.34,41.91 13.97,41.27 13.97,38.1 14.61,37.47 14.61,32.38 15.24,31.75 15.24,30.48 14.61,29.84 v14.61,27.56
  Bottom 0.254: v14.61,27.56 16.26,26.04 16.26,24.13 15.24,23.11 15.24,17.78 JP1X11.8
P3X12  (via drill 0.6 pad 1.01)
  Top 0.254: R3X12.2 R6X12.1 12.91,80.01 13.34,80.01 13.97,79.38 13.97,76.2 14.61,75.56 14.61,70.48 15.24,69.85 15.24,68.58 14.61,67.94 v14.61,65.66
  Bottom 0.254: v14.61,65.66 16.26,64.14 16.26,62.23 15.24,61.21 15.24,55.88 JP1X12.8
P3X21  (via drill 0.6 pad 1.01)
  Top 0.254: R3X21.2 R6X21.1 30.7,41.91 31.11,41.91 31.75,41.27 31.75,38.1 32.38,37.47 32.38,32.38 33.02,31.75 33.02,30.48 32.38,29.84 v32.38,27.56
  Bottom 0.254: v32.38,27.56 34.04,26.04 34.04,24.13 33.02,23.11 33.02,17.78 JP1X21.8
P3X22  (via drill 0.6 pad 1.01)
  Top 0.254: R3X22.2 R6X22.1 30.7,80.01 31.11,80.01 31.75,79.38 31.75,76.2 32.38,75.56 32.38,70.48 33.02,69.85 33.02,68.58 32.38,67.94 v32.38,65.66
  Bottom 0.254: v32.38,65.66 34.04,64.14 34.04,62.23 33.02,61.21 33.02,55.88 JP1X22.8
P3X31  (via drill 0.6 pad 1.01)
  Top 0.254: R3X31.2 R6X31.1 48.48,41.91 48.9,41.91 49.53,41.27 49.53,38.1 50.16,37.47 50.16,32.38 50.8,31.75 50.8,30.48 50.16,29.84 v50.16,27.56
  Bottom 0.254: v50.16,27.56 51.82,26.04 51.82,24.13 50.8,23.11 50.8,17.78 JP1X31.8
P3X32  (via drill 0.6 pad 1.01)
  Top 0.254: R3X32.2 R6X32.1 48.48,80.01 48.9,80.01 49.53,79.38 49.53,76.2 50.16,75.56 50.16,70.48 50.8,69.85 50.8,68.58 50.16,67.94 v50.16,65.66
  Bottom 0.254: v50.16,65.66 51.82,64.14 51.82,62.23 50.8,61.21 50.8,55.88 JP1X32.8
P3X41  (via drill 0.6 pad 1.01)
  Top 0.254: R3X41.2 R6X41.1 66.25,41.91 66.67,41.91 67.31,41.27 67.31,38.1 67.94,37.47 67.94,32.38 68.58,31.75 68.58,30.48 67.94,29.84 v67.94,27.56
  Bottom 0.254: v67.94,27.56 69.6,26.04 69.6,24.13 68.58,23.11 68.58,17.78 JP1X41.8
P3X42  (via drill 0.6 pad 1.01)
  Top 0.254: R3X42.2 R6X42.1 66.25,80.01 66.67,80.01 67.31,79.38 67.31,76.2 67.94,75.56 67.94,70.48 68.58,69.85 68.58,68.58 67.94,67.94 v67.94,65.66
  Bottom 0.254: v67.94,65.66 69.6,64.14 69.6,62.23 68.58,61.21 68.58,55.88 JP1X42.8
P3X51  (via drill 0.6 pad 1.01)
  Top 0.254: R3X51.2 R6X51.1 84.03,41.91 84.45,41.91 85.09,41.27 85.09,38.1 85.72,37.47 85.72,32.38 86.36,31.75 86.36,30.48 85.72,29.84 v85.72,27.56
  Bottom 0.254: v85.72,27.56 87.38,26.04 87.38,24.13 86.36,23.11 86.36,17.78 JP1X51.8
P3X52  (via drill 0.6 pad 1.01)
  Top 0.254: R3X52.2 R6X52.1 84.03,80.01 84.45,80.01 85.09,79.38 85.09,76.2 85.72,75.56 85.72,70.48 86.36,69.85 86.36,68.58 85.72,67.94 v85.72,65.66
  Bottom 0.254: v85.72,65.66 87.38,64.14 87.38,62.23 86.36,61.21 86.36,55.88 JP1X52.8
P4X11
  Top 0.254: RMX11.2 11.85,23.07 12.7,22.23 12.7,17.78 JP1X11.10
  Top 0.305: RMX11.2 D4X11.3
P4X12
  Top 0.254: RMX12.2 11.85,61.17 12.7,60.33 12.7,55.88 JP1X12.10
  Top 0.305: RMX12.2 D4X12.3
P4X21
  Top 0.254: RMX21.2 29.63,23.07 30.48,22.23 30.48,17.78 JP1X21.10
  Top 0.305: RMX21.2 D4X21.3
P4X22
  Top 0.254: RMX22.2 29.63,61.17 30.48,60.33 30.48,55.88 JP1X22.10
  Top 0.305: RMX22.2 D4X22.3
P4X31
  Top 0.254: RMX31.2 47.41,23.07 48.26,22.23 48.26,17.78 JP1X31.10
  Top 0.305: RMX31.2 D4X31.3
P4X32
  Top 0.254: RMX32.2 47.41,61.17 48.26,60.33 48.26,55.88 JP1X32.10
  Top 0.305: RMX32.2 D4X32.3
P4X41
  Top 0.254: RMX41.2 65.19,23.07 66.04,22.23 66.04,17.78 JP1X41.10
  Top 0.305: RMX41.2 D4X41.3
P4X42
  Top 0.254: RMX42.2 65.19,61.17 66.04,60.33 66.04,55.88 JP1X42.10
  Top 0.305: RMX42.2 D4X42.3
P4X51
  Top 0.254: RMX51.2 82.97,23.07 83.82,22.23 83.82,17.78 JP1X51.10
  Top 0.305: RMX51.2 D4X51.3
P4X52
  Top 0.254: RMX52.2 82.97,61.17 83.82,60.33 83.82,55.88 JP1X52.10
  Top 0.305: RMX52.2 D4X52.3
VCCX11  (via drill 0.6 pad 1.01)
  Bottom 0.61: v12.83,24.77 v15.24,24.77
  pour Top (isolate 0.305): 8,13.08 8,50.42 25.02,50.42 25.02,13.08
VCCX12  (via drill 0.6 pad 1.01)
  Bottom 0.61: v12.83,62.87 v15.24,62.87
  pour Top (isolate 0.305): 8,51.18 8,88.52 25.02,88.52 25.02,51.18
VCCX21  (via drill 0.6 pad 1.01)
  Bottom 0.61: v30.61,24.77 v33.02,24.77
  pour Top (isolate 0.305): 25.78,13.08 25.78,50.42 42.8,50.42 42.8,13.08
VCCX22  (via drill 0.6 pad 1.01)
  Bottom 0.61: v30.61,62.87 v33.02,62.87
  pour Top (isolate 0.305): 25.78,51.18 25.78,88.52 42.8,88.52 42.8,51.18
VCCX31  (via drill 0.6 pad 1.01)
  Bottom 0.61: v48.39,24.77 v50.8,24.77
  pour Top (isolate 0.305): 43.56,13.08 43.56,50.42 60.58,50.42 60.58,13.08
VCCX32  (via drill 0.6 pad 1.01)
  Bottom 0.61: v48.39,62.87 v50.8,62.87
  pour Top (isolate 0.305): 43.56,51.18 43.56,88.52 60.58,88.52 60.58,51.18
VCCX41  (via drill 0.6 pad 1.01)
  Bottom 0.61: v66.17,24.77 v68.58,24.77
  pour Top (isolate 0.305): 61.34,13.08 61.34,50.42 78.36,50.42 78.36,13.08
VCCX42  (via drill 0.6 pad 1.01)
  Bottom 0.61: v66.17,62.87 v68.58,62.87
  pour Top (isolate 0.305): 61.34,51.18 61.34,88.52 78.36,88.52 78.36,51.18
VCCX51  (via drill 0.6 pad 1.01)
  Bottom 0.61: v83.95,24.77 v86.36,24.77
  pour Top (isolate 0.305): 79.12,13.08 79.12,50.42 96.14,50.42 96.14,13.08
VCCX52  (via drill 0.6 pad 1.01)
  Bottom 0.61: v83.95,62.87 v86.36,62.87
  pour Top (isolate 0.305): 79.12,51.18 79.12,88.52 96.14,88.52 96.14,51.18

## Text on the board
tPlace: Turtle | v1.0 | Turtle | Turtle | Turtle | Turtle | Turtle | v1.0 | v1.0 | v1.0 | v1.0 | v1.0 | Motor | Motor | Motor | Motor | Motor | Occ | Norm | Rev | Occ | Norm | Rev | Occ | Norm | Rev | Occ | Norm | Rev | Occ | Norm | Rev | Turtle | Turtle | Turtle | Turtle | Turtle | v1.0 | v1.0 | v1.0 | v1.0 | v1.0 | Motor | Motor | Motor | Motor | Motor | Occ | Norm | Rev | Occ | Norm | Rev | Occ | Norm | Rev | Occ | Norm | Rev | Occ | Norm | Rev
bPlace: Turtle | Turtle | Turtle | Turtle | Turtle | www.SPCoast.com | 2020.09 | www.SPCoast.com | 2020.09 | www.SPCoast.com | 2020.09 | www.SPCoast.com | 2020.09 | www.SPCoast.com | 2020.09 | John Plocher | v1.0 | John Plocher | v1.0 | John Plocher | v1.0 | John Plocher | v1.0 | John Plocher | v1.0 | Model RR ing is fun!' | Made in the PCR, / Coast Div, NMRA | Model RR ing is fun!' | Made in the PCR, / Coast Div, NMRA | Model RR ing is fun!' | Made in the PCR, / Coast Div, NMRA | Model RR ing is fun!' | Made in the PCR, / Coast Div, NMRA | Model RR ing is fun!' | Made in the PCR, / Coast Div, NMRA | Turtle | Turtle | Turtle | Turtle | Turtle | www.SPCoast.com | 2020.09 | www.SPCoast.com | 2020.09 | www.SPCoast.com | 2020.09 | www.SPCoast.com | 2020.09 | www.SPCoast.com | 2020.09 | John Plocher | v1.0 | John Plocher | v1.0 | John Plocher | v1.0 | John Plocher | v1.0 | John Plocher | v1.0 | Model RR ing is fun!' | Made in the PCR, / Coast Div, NMRA | Model RR ing is fun!' | Made in the PCR, / Coast Div, NMRA | Model RR ing is fun!' | Made in the PCR, / Coast Div, NMRA | Model RR ing is fun!' | Made in the PCR, / Coast Div, NMRA | Model RR ing is fun!' | Made in the PCR, / Coast Div, NMRA
Document: Green | Green | Green | Green | Green | Green | Green | Green | Green | Green
_tNames: R3 | R2 | R1 | R3 | R2 | R1 | R3 | R2 | R1 | R3 | R2 | R1 | R3 | R2 | R1 | R6 | R5 | R4 | R6 | R5 | R4 | R6 | R5 | R4 | R6 | R5 | R4 | R6 | R5 | R4 | C3 | C2 | C1 | C3 | C2 | C1 | C3 | C2 | C1 | C3 | C2 | C1 | C3 | C2 | C1 | D3 | D2 | D1 | D3 | D2 | D1 | D3 | D2 | D1 | D3 | D2 | D1 | D3 | D2 | D1 | RO | RN | RR | RO | RN | RR | RO | RN | RR | RO | RN | RR | RO | RN | RR | D4 | D4 | D4 | D4 | D4 | RM | RM | RM | RM | RM | JP1 | JP1 | JP1 | JP1 | JP1 | R3 | R2 | R1 | R3 | R2 | R1 | R3 | R2 | R1 | R3 | R2 | R1 | R3 | R2 | R1 | R5 | R4 | R5 | R4 | R5 | R4 | R5 | R4 | R5 | R4 | R6 | R6 | R6 | R6 | R6 | C3 | C2 | C1 | C3 | C2 | C1 | C3 | C2 | C1 | C3 | C2 | C1 | C3 | C2 | C1 | D3 | D2 | D1 | D3 | D2 | D1 | D3 | D2 | D1 | D3 | D2 | D1 | D3 | D2 | D1 | RO | RN | RR | RO | RN | RR | RO | RN | RR | RO | RN | RR | RO | RN | RR | D4 | D4 | D4 | D4 | D4 | RM | RM | RM | RM | RM | JP1 | JP1 | JP1 | JP1 | JP1